# EAGLE board IMU_Board (EAGLE 9.6.2)
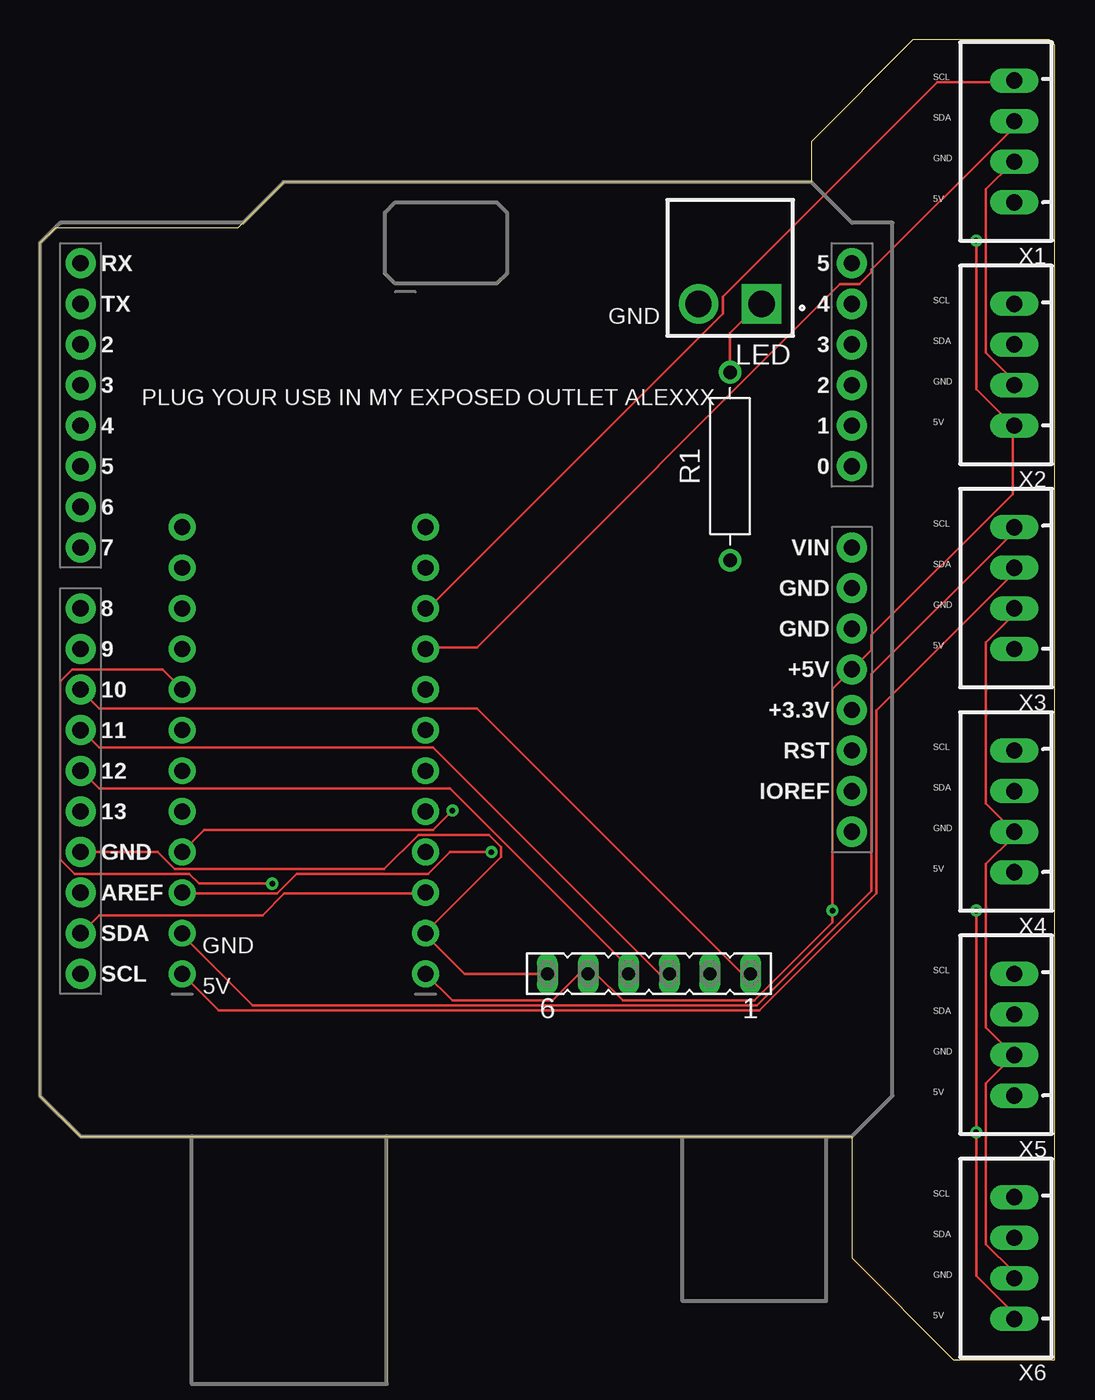
[diagram p0: board, top side]
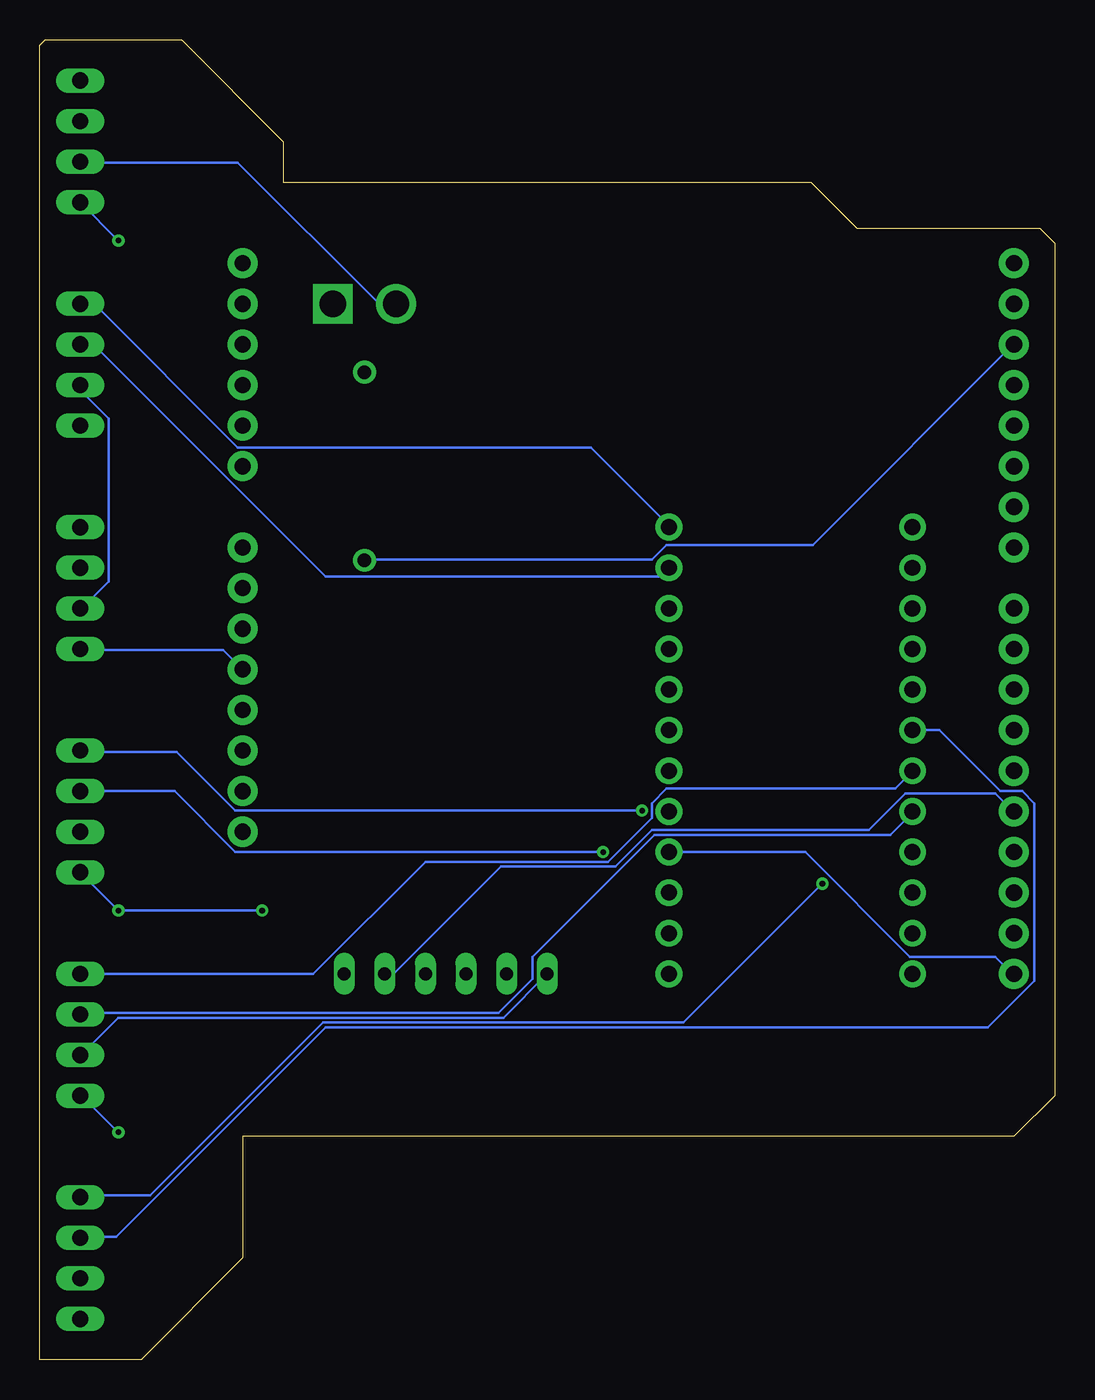
[diagram p1: board, bottom side, seen from below]

Size 63.48 x 82.55 mm. Coordinates in mm from the lower left corner, seen from the top.
Outline: 0,69.85 0,16.51 2.54,13.97 50.8,13.97 50.8,6.35 57.15,0 63.48,0 63.48,82.22 63.15,82.55 54.61,82.55 48.26,76.2 48.26,73.66 15.24,73.66 12.37,70.79 0.94,70.79 0,69.85
Copper layers (1*16): Top 0.035mm / dielectric 1.5mm / Bottom 0.035mm
Design rules "default": minimum track width 6mil, minimum drill 0.35mm, track to track 6mil, track to pad 6mil, pad to pad 6mil, via to via 6mil, smd to smd 6mil, copper to edge 40mil, drill to drill 6mil, minimum pad ring 10mil, minimum via ring 8mil, stop-mask expansion 4mil, vias tented up to drill 0mil, thermal gap 10mil

## Footprints (pad centres in the part's own frame; a part is rotated, then mirrored left to right if it is on the bottom)
UNO_R3_SHIELD = drill 1.016 pad 1.88: 3.3V 24.13,-2.54; 5V 24.13,0; A0 24.13,12.7; A1 24.13,15.24; A2 24.13,17.78; A3 24.13,20.32; A4 24.13,22.86; A5 24.13,25.4; AREF -24.13,-13.97; D2 -24.13,20.32; D3 -24.13,17.78; D4 -24.13,15.24; D5 -24.13,12.7; D6 -24.13,10.16; D7 -24.13,7.62; D8 -24.13,3.81; D9 -24.13,1.27; D10 -24.13,-1.27; D11 -24.13,-3.81; D12 -24.13,-6.35; D13 -24.13,-8.89; GND@0 24.13,2.54; GND@1 24.13,5.08; GND@2 -24.13,-11.43; IOREF 24.13,-7.62; NC 24.13,-10.16; RES 24.13,-5.08; RX -24.13,25.4; SCL -24.13,-19.05; SDA -24.13,-16.51; TX -24.13,22.86; VIN 24.13,7.62
1X12_ROUND = drill 1 pad 1.676: 1 -13.97,0; 2 -11.43,0; 3 -8.89,0; 4 -6.35,0; 5 -3.81,0; 6 -1.27,0; 7 1.27,0; 8 3.81,0; 9 6.35,0; 10 8.89,0; 11 11.43,0; 12 13.97,0
HDR-02 = drill 1.65 square: 1 -1.98,0 | drill 1.65: 2 1.98,0
RESAD1176W63L850D250B = drill 0.83 pad 1.43: 1 -5.88,0; 2 5.88,0
FE06 = drill 0.813 long: 1 -6.35,0; 2 -3.81,0; 3 -1.27,0; 4 1.27,0; 5 3.81,0; 6 6.35,0
JST-XH-04-PACKAGE-LONG-PAD = drill 1.016 long: 1 -3.81,0; 2 -1.27,0; 3 1.27,0; 4 3.81,0

## Placement (x,y rotation side)
B1  ARDUINO_UNO_R3_SHIELDBASIC  [UNO_R3_SHIELD]  26.67,43.18 0 top
JP1  [1X12_ROUND]  8.89,38.1 90 top
JP3  [1X12_ROUND]  24.13,38.1 90 top
LED  B2P-VH(LF)(SN)  [HDR-02]  43.18,66.04 180 top
R1  [RESAD1176W63L850D250B]  43.18,55.88 90 top
SD  [FE06]  38.1,24.13 180 top
X1  JST-XH-04-PIN-LONG-PAD  [JST-XH-04-PACKAGE-LONG-PAD]  60.96,76.2 90 top
X2  JST-XH-04-PIN-LONG-PAD  [JST-XH-04-PACKAGE-LONG-PAD]  60.96,62.23 90 top
X3  JST-XH-04-PIN-LONG-PAD  [JST-XH-04-PACKAGE-LONG-PAD]  60.96,48.26 90 top
X4  JST-XH-04-PIN-LONG-PAD  [JST-XH-04-PACKAGE-LONG-PAD]  60.96,34.29 90 top
X5  JST-XH-04-PIN-LONG-PAD  [JST-XH-04-PACKAGE-LONG-PAD]  60.96,20.32 90 top
X6  JST-XH-04-PIN-LONG-PAD  [JST-XH-04-PACKAGE-LONG-PAD]  60.96,6.35 90 top

## Library data of the parts
B1 = SparkFun-Boards
JP1 JP3 = microbuilder
LED = Connectors; CREATED_BY: PCBLayout.com; DIGIKEY_PART_NUMBER: 455-1639-ND; MANUFACTURER: JST Sales America Inc.; MPN: B2P-VH(LF)(SN)
R1 = Resistor; CATEGORY: Resistor; SUB-CATEGORY: Fixed
SD = con-lsta; OC_FARNELL: unknown; OC_NEWARK: unknown
X1-X6 = Rembrandt Electronics - JST XH Connectors v1-0

## Nets
0SCL: JP3.10 X1.4
0SDA: JP3.9 X1.3
1SCL: JP3.12 X2.4
1SDA: JP3.11 X2.3
2SCL: JP1.2 X3.4
2SDA: JP1.1 X3.3
3SCL: JP1.4 X4.4
3SDA: JP1.3 X4.3
4SCL: JP1.6 X5.4
4SDA: JP1.5 X5.3
5SCL: JP1.8 X6.4
5SDA: JP1.7 X6.3
6SCL: JP1.10
6SDA: JP1.9
7SCL: JP1.12
7SDA: JP1.11
A5V: B1.5V JP3.1 SD.5 X1.1 X2.1 X3.1 X4.1 X5.1 X6.1
AD2: B1.D2 R1.1
AD10: B1.D10 SD.1
AD11: B1.D11 SD.3
AD12: B1.D12 SD.4
AD13: B1.D13 SD.2
AGND: B1.GND@2 JP3.2 LED.2 SD.6 X1.2 X2.2 X3.2 X4.2 X5.2 X6.2
ASCL: B1.SCL JP3.4
ASDA: B1.SDA JP3.3
R15V: LED.1 R1.2

## Tracks (layer width: path | path; a pad name or v marks a point on that pad's centre or on a via)
0SCL
  Top 0.152: JP3.10 24.28,46.99 42.72,65.43 42.72,66.5 56.13,79.91 60.86,79.91 X1.4
0SDA
  Top 0.152: X1.3 60.86,77.47 60.86,77.01 52.02,68.17 52.02,68.02 51.26,67.26 50.04,67.26 27.33,44.55 24.13,44.55 JP3.9
1SCL
  Bottom 0.152: X2.4 60.1,66.04 51.1,57.05 29.01,57.05 24.13,52.17 JP3.12
1SDA
  Bottom 0.152: X2.3 60.86,63.45 60.1,63.45 45.62,48.97 24.59,48.97 24.13,49.43 JP3.11
2SCL
  Top 0.152: X3.4 60.86,52.02 60.86,51.71 52.02,42.88 52.02,29.31 44.86,22.15 13.31,22.15 8.89,26.57 JP1.2
2SDA
  Top 0.152: JP1.1 11.18,21.84 45.01,21.84 52.32,29.16 52.32,40.59 60.86,49.12 60.86,49.43 X3.3
3SCL  (via drill 0.35)
  Top 0.152: v25.81,34.34 24.59,33.12 10.26,33.12 JP1.4
  Bottom 0.152: v25.81,34.34 51.26,34.34 54.91,38 60.86,38 X4.4
3SDA  (via drill 0.35)
  Top 0.152: v28.24,31.75 25.65,31.75 24.28,30.38 16.05,30.38 14.83,29.16 8.89,29.16 JP1.3
  Bottom 0.152: X4.3 55.07,35.56 51.26,31.75 v28.24,31.75
4SCL
  Bottom 0.152: X5.4 46.38,24.13 39.37,31.14 27.94,31.14 25.2,33.88 25.2,34.8 24.28,35.71 9.96,35.71 8.89,36.78 JP1.6
4SDA
  Bottom 0.152: X5.3 60.86,21.69 34.8,21.69 32.66,23.82 32.66,25.2 25.04,32.82 10.26,32.82 8.89,34.19 JP1.5
5SCL  (via drill 0.35)
  Top 0.152: v14.53,29.77 9.96,29.77 9.35,30.38 2.18,30.38 1.27,31.29 1.27,42.42 2.03,43.18 7.67,43.18 8.89,41.96 JP1.8
  Bottom 0.152: v14.53,29.77 23.22,21.08 45.77,21.08 56.59,10.26 60.86,10.26 X6.4
5SDA
  Bottom 0.152: JP1.7 7.21,39.37 3.4,35.56 2.03,35.56 1.27,34.8 1.27,23.67 4.17,20.78 45.62,20.78 58.73,7.67 60.86,7.67 X6.3
A5V  (via drill 0.35)
  Top 0.152: X6.1 60.86,2.64 60.86,2.95 58.57,5.23 v58.57,14.22 v58.57,28.09 | JP3.1 25.81,22.45 32.05,22.45 33.73,24.13 SD.5 34.8,24.13 36.47,22.45 44.7,22.45 49.58,27.33 v49.58,28.09 49.58,41.96 B1.5V 52.02,44.4 52.02,45.31 60.86,54.15 60.86,58.42 | v58.57,70 58.57,60.71 60.86,58.42 | 60.86,58.42 X2.1
  Bottom 0.152: v58.57,14.22 60.86,16.51 X5.1 | X4.1 v58.57,28.09 v49.58,28.09 | B1.5V 52.02,44.4 60.86,44.4 X3.1 | v58.57,70 X1.1
AD2
  Bottom 0.152: R1.1 43.18,50.04 25.2,50.04 24.28,50.95 15.14,50.95 2.64,63.45 B1.D2
AD10
  Top 0.152: SD.1 43.94,24.13 27.33,40.74 3.71,40.74 B1.D10
AD11
  Top 0.152: SD.3 38.76,24.13 24.59,38.3 3.71,38.3 2.64,39.37 B1.D11
AD12
  Top 0.152: SD.4 36.78,24.13 36.78,24.59 25.65,35.71 3.71,35.71 2.64,36.78 B1.D12
AD13
  Bottom 0.152: SD.2 41.35,24.13 34.65,30.84 27.48,30.84 25.2,33.12 11.63,33.12 9.35,35.41 3.71,35.41 2.64,34.34 B1.D13
AGND
  Top 0.152: SD.6 26.57,24.13 24.13,26.57 JP3.2 24.13,26.72 28.85,31.45 28.85,32.05 28.09,32.82 23.67,32.82 21.54,30.68 8.43,30.68 7.37,31.75 B1.GND@2 | X2.2 60.86,61.01 60.86,61.32 59.18,62.99 59.18,73.2 60.86,74.88 X1.2 | X6.2 60.86,5.08 60.86,5.54 59.18,7.21 59.18,17.27 X5.2 60.86,19.1 59.18,20.78 59.18,30.99 60.86,32.66 60.86,32.97 X4.2 59.18,34.8 59.18,44.86 60.86,46.53 60.86,46.99 X3.2
  Bottom 0.152: LED.2 42.27,66.04 51.1,74.88 60.86,74.88 X1.2 | X2.2 60.86,60.86 60.86,60.55 59.18,58.88 59.18,48.67 60.86,46.99 X3.2 | SD.6 34.49,21.39 58.57,21.39 60.86,19.1 X5.2
ASCL
  Bottom 0.152: JP3.4 15.6,31.75 9.04,25.2 3.71,25.2 2.64,24.13 B1.SCL
ASDA
  Top 0.152: JP3.3 24.13,29.16 15.29,29.16 13.92,27.79 3.71,27.79 2.64,26.72 B1.SDA
R15V
  Top 0.152: R1.2 43.18,64.21 45.01,66.04 LED.1

## Text on the board
tNames: SCL | SDA | GND | 5V | SCL | GND | SDA | GND | PLUG YOUR USB IN MY EXPOSED OUTLET ALEXXX | 5V | SCL | SDA | GND | 5V | SCL | SDA | GND | 5V | GND | SCL | 5V | SDA | GND | 5V | SCL | SDA | GND | 5V